# Altium PCB EMS_TC_PCB_V2.PcbDoc (part 2 of 2)
Units mil, origin at the board's own origin, x right, y up, seen from the top; angles counter-clockwise.
Board outline 4000 x 10000 mil, 4 copper layers (Top Layer, GND_1, Signal_2, GND_2), stack 53.912 mil thick; 64 components, 62 nets, 322 pads, 104 vias.
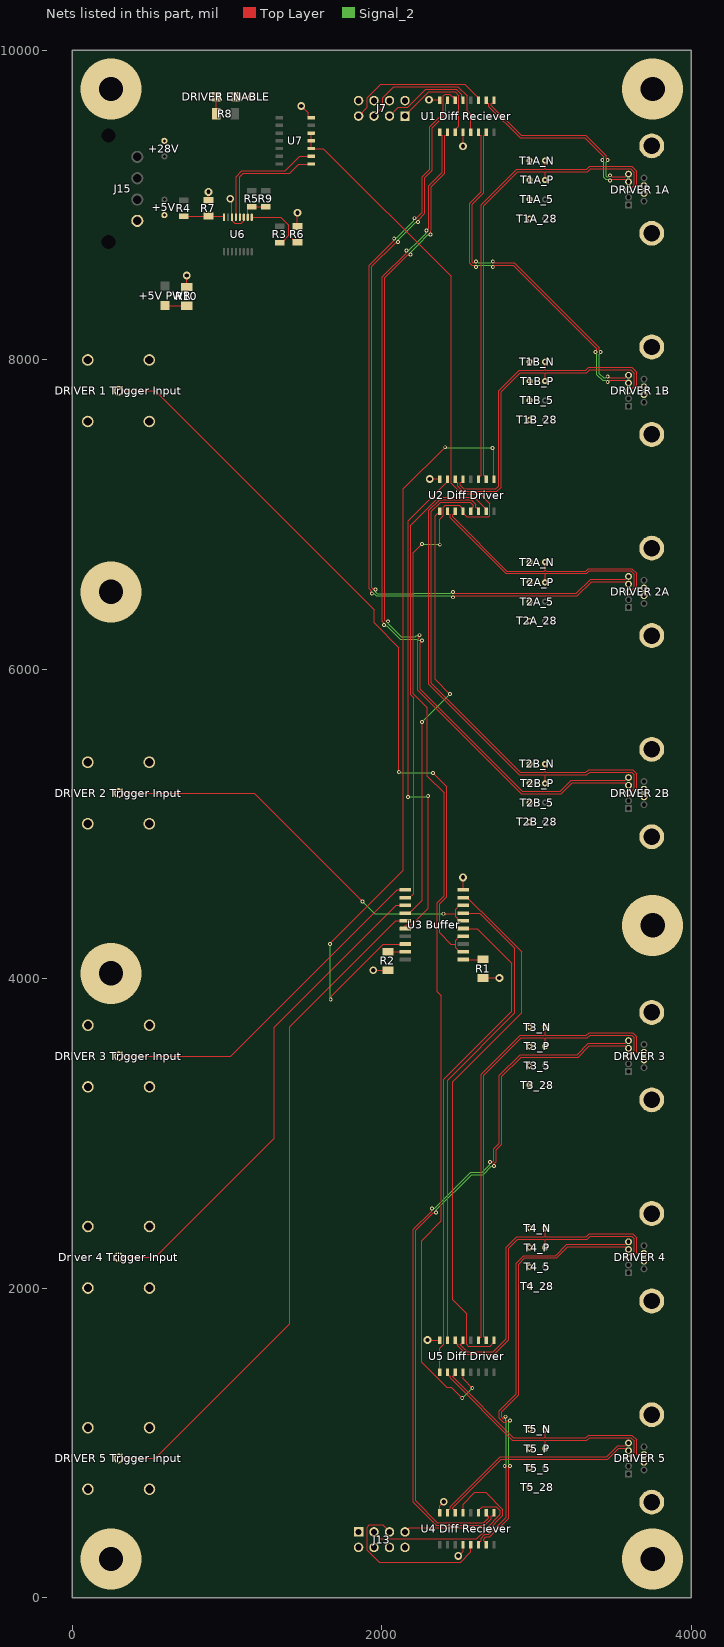
[diagram p4: the nets of this part, all layers, seen from the top]

## Via types
v1: diameter 25, hole 13, Top Layer to GND_2, 82 vias
v2: diameter 50, hole 28, Top Layer to GND_2, 15 vias
v3: diameter 393.7, hole 157.48, Top Layer to GND_2, 7 vias

## Nets (pads, with @x,y where several pads share a name; then routed paths per layer and width w, separated by ;. In a path a pad name is that pad's centre, name@x,y a point inside that pad or via, vN(x,y) a via of type N, cw(c..) or ccw(c..) an arc to the next point about the centre after c; other vN are vias at no path point) (continued)
GND: "DRIVER 1 Trigger Input.MH" "DRIVER 1A.7" "DRIVER 1A.10" "DRIVER 1A.11" "DRIVER 1B.7" "DRIVER 1B.10" "DRIVER 1B.11" "DRIVER 2 Trigger Input.MH" "DRIVER 2A.7" "DRIVER 2A.10" "DRIVER 2A.11" "DRIVER 2B.7" "DRIVER 2B.10" "DRIVER 2B.11" "DRIVER 3 Trigger Input.MH" "DRIVER 3.7" "DRIVER 3.10" "DRIVER 3.11" "Driver 4 Trigger Input.MH" "DRIVER 4.7" "DRIVER 4.10" "DRIVER 4.11" "DRIVER 5 Trigger Input.MH" "DRIVER 5.7" "DRIVER 5.10" "DRIVER 5.11" "DRIVER ENABLE.2" "U1 Diff Reciever.8" "U1 Diff Reciever.12" "U2 Diff Driver.8" "U3 Buffer.10" "U4 Diff Reciever.8" "U4 Diff Reciever.12" "U5 Diff Driver.8" +5V.2 +28V.2 J7.2 J7.4 J7.6 J7.8 J13.1 J13.2 J13.4 J13.6 J13.8 J15.A4 R1.2 R2.2 R6.1 R7.1 R10.1 T1A_5.2 T1A_28.2 T1A_N.2 T1A_P.2 T1B_5.2 T1B_28.2 T1B_N.2 T1B_P.2 T2A_5.2 T2A_28.2 T2A_N.2 T2A_P.2 T2B_5.2 T2B_28.2 T2B_N.2 T2B_P.2 T3_5.2 T3_28.2 T3_N.2 T3_P.2 T4_5.2 T4_28.2 T4_N.2 T4_P.2 T5_5.2 T5_28.2 T5_N.2 T5_P.2 U6.3 U6.6 U7.7 | length 1439.7
  Top Layer w6: R10.1@740,8470.08 v2(740,8545) ; R7.1@880,9031.18 v2(880,9085) ; v2(1020,9040) 1020,9028.09 1030.81,9017.29 1030.81,8922.03 U6.6@1031.61,8921.22 1031.61,8901.4 1037.31,8895.7 1037.31,8895.27 1048.97,8883.61 1091.03,8883.61 1106.9,8899.48 1106.9,8919.73 U6.3@1108.39,8921.22 ; 1057.99,9700 v2(1160,9700) ; R6.1@1455,8861.18 v2(1455,8950) ; v2(1480,9640) 1523.27,9596.73 1523.27,9572.83 1531.09,9565 U7.7@1543.35,9565 ; v2(1945,4055) R2.2@2040,4054.96 R2.2@2040,4054.96 ; v2(2295,1665) 2373.35,1665 2375,1663.35 ; v2(2305,9680) 2373.35,9680 2375,9678.35 ; v2(2310,7230) 2373.35,7230 2375,7228.35 ; 2375,550 2375,595 v2(2400,620) ; v2(2495,270) 2525,300 2525,343.31 ; v2(2525,4655) 2525,4576.24 2527.01,4574.23 ; v2(2525,9380) 2525,9471.65 ; R1.2@2655,4004.96 R1.2@2655,4004.96 v2(2760,4005)
  other v3: 250,250 3750,250 250,4035 3750,4345 250,6500 250,9750 3750,9750
INV_Driver_EN: "U2 Diff Driver.12" "U5 Diff Driver.12" U7.3 U7.4 U7.5 | length 9849.7
  Top Layer w6: U7.5@1543.35,9465 U7.4@1543.35,9415 U7.3@1543.35,9365 1622.63,9365 2448.83,8538.8 2448.83,7201.84 2517.67,7133 2637,7133 2698.83,7071.17 2698.83,6992.8 2690.07,6984.05 2548.83,6984.05 2525,7007.87 2525,7021.65 2525,7035.43 2501.17,7059.26 2409.93,7059.26 2398.83,7048.16 2398.83,6992.8 2375,6968.98 v1(2375,6805) ; v1(2260,6810) 2202.01,6752.01 2202.01,5842.99 2295,5750 2295,5310 2404.5,5200.5 2404.5,4536.69 2358,4490.19 2358,3917.1 2385,3890.1 2385,2435 2257,2307 2257,1521.98 2418.26,1360.72 2449.28,1360.72 v1(2520,1290) ; 2525,1456.65 2525,1415 v1(2585,1355)
  Signal_2 w6: v1(2260,6810) 2262.5,6807.5 2372.5,6807.5 v1(2375,6805) ; v1(2520,1290) v1(2585,1355)
NetDS1_1: "DRIVER ENABLE.1" R8.2 | length 110.9
  Top Layer w6: R8.2@929.92,9590 929.92,9697.91 932.01,9700
NetDS2_2: "+5V PWR.2" R10.2 | length 140
  Top Layer w6: 600,8350 739.92,8350 R10.2@740,8349.92
NetR1_1: "U3 Buffer.1" R1.1 | length 128.3
  Top Layer w6: 2527.01,4124.23 2654.19,4124.23 R1.1@2655,4125.04
NetR2_1: "U3 Buffer.19" R2.1 | length 113.3
  Top Layer w6: R2.1@2040,4175.04 2040.81,4174.23 2152.99,4174.23
NetR3_1: R3.1 R6.2 U6.1 | length 480
  Top Layer w6: U6.1@1159.57,8921.22 1347.56,8921.22 1399.37,8869.41 1399.37,8804.41 1352.8,8757.83 R3.1@1340,8757.83 ; 1398.48,8803.52 1443.19,8758.82 R6.2@1455,8758.82
NetR4_1: R4.1 R7.2 U6.8 | length 266.3
  Top Layer w6: R4.1@720,8927.83 879.02,8927.83 R7.2@880,8928.82 976.84,8928.82 980.43,8925.23 U6.8@980.43,8921.22
NetR5_1: R5.1 R9.2 U6.2 | length 174
  Top Layer w6: U6.2@1133.98,8921.22 1133.98,8973.12 1148.69,8987.83 R5.1@1160,8987.83 R9.2@1250,8987.83
T1A: "U2 Diff Driver.1" "U3 Buffer.18" | length 5036.1
  Top Layer w6: v1(1665,4225) 2140,4700 2140,7165 v1(2410,7435) ; v1(1670,3865) 1673.04,3868.04 1673.04,3886.5 2010.77,4224.23 2152.99,4224.23 ; v1(2715,7430) 2725,7420 2725,7228.35
  Signal_2 w6: v1(1665,4225) 1667.5,4222.5 1667.5,3867.5 v1(1670,3865) ; v1(2410,7435) 2412.5,7432.5 2712.5,7432.5 v1(2715,7430)
T1B: "U2 Diff Driver.7" "U3 Buffer.16" | length 3229.5
  Top Layer w6: 2152.99,4324.23 2152.99,4345.04 2157.37,4349.42 2194.6,4349.42 2300,4454.82 v1(2300,5180) ; v1(2170,5175) 2170.01,6959.58 2425,7214.57 2425,7228.35
  Signal_2 w6: v1(2170,5175) 2172.5,5177.5 2297.5,5177.5 v1(2300,5180)
T2A: "U2 Diff Driver.9" "U3 Buffer.14" | length 2783.1
  Top Layer w6: 2152.99,4424.23 2178.58,4424.23 2260,4505.65 v1(2260,5660) ; 2375,7021.65 2345,6991.65 2345,5935 v1(2440,5840)
  Signal_2 w6: v1(2260,5660) v1(2440,5840)
T2B: "U2 Diff Driver.15" "U3 Buffer.12" | length 3060.8
  Top Layer w6: 2152.99,4524.23 2178.58,4524.23 2205,4550.65 2205,5815 2186.01,5833.99 2186.01,6931.27 2366.75,7112 2598.43,7112 2675,7035.43 2675,7021.65
T3: "U3 Buffer.9" "U5 Diff Driver.1" | length 3486.3
  Top Layer w6: 2527.01,4524.23 2552.6,4524.23 2636.6,4440.23 2639.77,4440.23 2905,4175 2905,3780 2460,3335 2460,1925 2548.83,1836.17 2548.83,1636.84 2559.93,1625.74 2701.17,1625.74 2725,1649.57 2725,1663.35
T4: "U3 Buffer.7" "U5 Diff Driver.7" | length 3141.2
  Top Layer w6: 2425,1663.35 2425,3345 2860,3780 2860,4197.37 2633.14,4424.23 2527.01,4424.23
T5: "U3 Buffer.5" "U5 Diff Driver.9" | length 3241.8
  Top Layer w6: 2375,1456.65 2375,1610.67 2401.17,1636.84 2401.17,3351.17 2840,3790 2840,4100 2615.77,4324.23 2527.01,4324.23
TELE_1_A_N: "DRIVER 1A.5" "U1 Diff Reciever.1" | length 1222.4
  Top Layer w6: 2725,9678.35 2725,9665.25 2717.17,9657.43 2711.51,9657.43 2708,9653.91 2708,9642.67 2900.67,9450 3318.03,9450 3437.61,9330.42 3450.5,9317.53 3450.5,9303.01 3460,9293.51 v1(3460,9290) ; v1(3475,9192.5) 3478.51,9192.5 3488.01,9183 3572.55,9183 3589.55,9200 3594.49,9200
  Signal_2 w6: v1(3460,9290) 3460,9286.49 3450.5,9276.99 3450.5,9186.59 3454.09,9183 3461.99,9183 3471.49,9192.5 v1(3475,9192.5)
TELE_1_A_P: "DRIVER 1A.4" "U1 Diff Reciever.2" | length 1248.9
  Top Layer w6: 2675,9678.35 2675,9665.25 2682.83,9657.43 2688.49,9657.43 2692,9653.91 2692,9636.04 2894.04,9434 3311.41,9434 3430.99,9314.42 3434.5,9310.91 3434.5,9303.01 3425,9293.51 v1(3425,9290) ; v1(3475,9157.5) 3478.51,9157.5 3488.01,9167 3572.55,9167 3589.55,9150 3594.49,9150
  Signal_2 w6: v1(3425,9290) 3425,9286.49 3434.5,9276.99 3434.5,9179.97 3447.47,9167 3461.99,9167 3471.49,9157.5 v1(3475,9157.5)
TELE_1_B_N: "DRIVER 1B.5" "U1 Diff Reciever.15" | length 2336.7
  Top Layer w6: v1(2610,8635.5) 2606.49,8635.5 2596.99,8626 2589.09,8626 2585.58,8629.51 2585.58,9006.37 2658,9078.79 2658,9447.22 2661.51,9450.74 2667.17,9450.74 2675,9458.56 2675,9471.65 ; v1(2717.5,8635) 2718.51,8635 2728.01,8625.5 2857.53,8625.5 3405.5,8077.53 3405.5,8063.01 3415,8053.51 v1(3415,8050) ; v1(3460,7892.5) 3463.51,7892.5 3473.01,7883 3572.55,7883 3589.55,7900 3594.49,7900
  Signal_2 w6: v1(2610,8635.5) 2613.51,8635.5 2623.01,8626 2660.88,8626 2661.38,8625.5 2702.86,8625.5 2712.36,8635 v1(2717.5,8635) ; v1(3415,8050) 3415,8046.49 3405.5,8036.99 3405.5,7910.94 3433.44,7883 3446.99,7883 3456.49,7892.5 v1(3460,7892.5)
TELE_1_B_P: "DRIVER 1B.4" "U1 Diff Reciever.14" | length 2363.2
  Top Layer w6: v1(2610,8600.5) 2606.49,8600.5 2596.99,8610 2582.47,8610 2569.58,8622.89 2569.58,9013 2642,9085.42 2642,9447.22 2638.49,9450.74 2632.83,9450.74 2625,9458.56 2625,9471.65 ; v1(2717.5,8600) 2718.51,8600 2728.01,8609.5 2850.91,8609.5 3389.5,8070.91 3389.5,8063.01 3380,8053.51 v1(3380,8050) ; v1(3460,7857.5) 3463.51,7857.5 3473.01,7867 3572.55,7867 3589.55,7850 3594.49,7850
  Signal_2 w6: v1(2610,8600.5) 2613.51,8600.5 2623.01,8610 2654.25,8610 2654.75,8609.5 2702.86,8609.5 2712.36,8600 v1(2717.5,8600) ; v1(3380,8050) 3380,8046.49 3389.5,8036.99 3389.5,7904.31 3426.81,7867 3446.99,7867 3456.49,7857.5 v1(3460,7857.5)
TELE_1A: "U1 Diff Reciever.3" J7.7 | length 946.1
  Top Layer w6: J7.7@1850,9575 1906.49,9631.49 1906.49,9693.02 1993.42,9779.95 2537.17,9779.95 2625,9692.13 2625,9678.35
TELE_1B: "U1 Diff Reciever.13" J7.5 | length 983
  Top Layer w6: J7.5@1950,9575 2006.49,9631.49 2006.49,9693.02 2077.42,9763.95 2492.07,9763.95 2551.17,9704.85 2551.17,9610.97 2575,9587.14 2575,9471.65
TELE_2_A_N: "DRIVER 2A.5" "U1 Diff Reciever.7" | length 5107.3
  Top Layer w6: v1(1960,6515) 1957.51,6517.49 1944.08,6517.49 1934.5,6527.07 1934.5,8602.93 2089.08,8757.51 2102.51,8757.51 v1(2105,8760) ; v1(2235,8890) 2237.49,8892.49 2237.49,8905.92 2277.56,8946 2277.56,9174.93 2326,9223.37 2326,9498.37 2414.83,9587.2 2414.83,9654.39 2425,9664.57 2425,9678.35 ; v1(2460,6500) 2463.51,6500 2473.01,6490.5 3257.87,6490.5 3350.37,6583 3572.55,6583 3589.55,6600 3594.49,6600
  Signal_2 w6: v1(1960,6515) 1962.49,6512.51 1962.49,6499.08 1972.07,6489.5 2208.31,6489.5 2209.31,6490.5 2446.99,6490.5 2456.49,6500 v1(2460,6500) ; v1(2105,8760) 2107.49,8762.49 2107.49,8775.92 2164.25,8832.69 2219.08,8887.51 2232.51,8887.51 v1(2235,8890)
TELE_2_A_P: "DRIVER 2A.4" "U1 Diff Reciever.6" | length 5260.1
  Top Layer w6: v1(1935.25,6490.25) 1932.77,6492.74 1932.77,6506.17 1918.5,6520.44 1918.5,8609.56 2077.77,8768.83 2077.77,8782.26 v1(2080.25,8784.75) ; v1(2210.25,8914.75) 2212.74,8917.23 2226.17,8917.23 2261.56,8952.62 2261.56,9181.56 2310,9230 2310,9505 2398.83,9593.83 2398.83,9704.85 2409.93,9715.95 2440.07,9715.95 2456.76,9699.26 2467.17,9699.26 2475,9691.44 2475,9678.35 ; v1(2460,6465) 2463.51,6465 2473.01,6474.5 3264.5,6474.5 3357,6567 3572.55,6567 3589.55,6550 3594.49,6550
  Signal_2 w6: v1(1935.25,6490.25) 1937.74,6487.77 1951.17,6487.77 1965.44,6473.5 2214.94,6473.5 2215.94,6474.5 2446.99,6474.5 2456.49,6465 v1(2460,6465) ; v1(2080.25,8784.75) 2082.74,8787.23 2096.17,8787.23 2157.63,8848.69 2207.77,8898.83 2207.77,8912.26 v1(2210.25,8914.75)
TELE_2_B_N: "DRIVER 2B.5" "U1 Diff Reciever.9" | length 5630.6
  Top Layer w6: v1(2015.25,6285.25) 2012.77,6287.74 2012.77,6301.17 2002.5,6311.44 2002.5,6341.91 2004,6343.41 2004,8535.94 2157.33,8689.27 2157.33,8702.7 v1(2159.81,8705.19) ; v1(2259.51,6185) 2259.51,6181.49 2250.01,6171.99 2250.01,5870.24 2909.25,5211 3151.83,5211 3223.83,5283 3572.55,5283 3589.55,5300 3594.49,5300 ; v1(2289.25,8835) 2290,8835 2305,8850 2305,9125.33 2392,9212.33 2392,9447.22 2388.49,9450.74 2382.83,9450.74 2375,9458.56 2375,9471.65
  Signal_2 w6: v1(2015.25,6285.25) 2017.74,6282.77 2031.17,6282.77 2119.44,6194.5 2230.93,6194.5 2238.01,6187.41 2257.1,6187.41 v1(2259.51,6185) ; v1(2159.81,8705.19) 2162.3,8707.67 2175.73,8707.67 2234.2,8766.14 2286.95,8818.89 2286.95,8832.7 v1(2289.25,8835)
TELE_2_B_P: "DRIVER 2B.4" "U1 Diff Reciever.10" | length 5657.2
  Top Layer w6: v1(2040,6310) 2037.51,6312.49 2024.08,6312.49 2018.5,6318.07 2018.5,6335.28 2020,6336.78 2020,8529.31 2168.64,8677.95 2182.08,8677.95 v1(2184.56,8680.44) ; v1(2243.51,6220) 2241.25,6217.74 2241.25,6202.8 2234.01,6195.56 2234.01,5863.61 2902.63,5195 3158.46,5195 3230.46,5267 3572.55,5267 3589.55,5250 3594.49,5250 ; v1(2314.75,8810.25) 2316.93,8812.43 2316.93,8831.75 2321,8835.82 2321,9118.7 2408,9205.7 2408,9447.22 2411.51,9450.74 2417.17,9450.74 2425,9458.56 2425,9471.65
  Signal_2 w6: v1(2040,6310) 2042.49,6307.51 2042.49,6294.08 2126.07,6210.5 2216.99,6210.5 2222.85,6216.36 2239.88,6216.36 v1(2243.51,6220) ; v1(2184.56,8680.44) 2187.05,8682.92 2187.05,8696.36 2240.83,8750.14 2298.64,8807.95 2312.45,8807.95 v1(2314.75,8810.25)
TELE_2A: "U1 Diff Reciever.5" J7.3 | length 590.3
  Top Layer w6: J7.3@2050,9575 2106.49,9631.49 2168.02,9631.49 2284.49,9747.95 2480.7,9747.95 2517.17,9711.48 2517.17,9686.17 2525,9678.35
TELE_2B: "U1 Diff Reciever.11" J7.1 | length 671.7
  Top Layer w6: J7.1@2150,9575 2177.51,9602.51 2177.51,9606.25 2303.21,9731.95 2474.07,9731.95 2498.83,9707.2 2498.83,9509.26 2475,9485.43 2475,9471.65
TELE_3: "U4 Diff Reciever.3" J13.7 | length 862.4
  Top Layer w6: J13.7@2150,425 2178,453 2680.68,453 2766.92,539.24 2766.92,560.76 2740.07,587.61 2648.83,587.61 2625,563.78 2625,550
TELE_3_N: "DRIVER 3.5" "U4 Diff Reciever.1" | length 4607.9
  Top Layer w6: v1(2325.25,2514.75) 2322.77,2512.26 2322.77,2498.83 2204,2380.06 2204,618.37 2353.37,469 2666.63,469 2708,510.37 2708,525.57 2711.51,529.08 2717.17,529.08 2725,536.91 2725,550 ; v1(2700,2815) 2702.49,2817.49 2715.92,2817.49 2722.67,2824.24 2722.67,2900.3 2759,2936.63 2759,3375.63 2893.37,3510 3262.37,3510 3335.37,3583 3572.55,3583 3589.55,3600 3594.49,3600
  Signal_2 w6: v1(2325.25,2514.75) 2327.74,2517.23 2341.17,2517.23 2574.31,2750.38 2648.81,2750.38 2697.51,2799.08 2697.51,2812.51 v1(2700,2815)
TELE_3_P: "DRIVER 3.4" "U4 Diff Reciever.2" | length 4528.4
  Top Layer w6: v1(2350,2490) 2347.51,2487.51 2334.08,2487.51 2220,2373.43 2220,625 2360,485 2660,485 2692,517 2692,525.57 2688.49,529.08 2682.83,529.08 2675,536.91 2675,550 ; v1(2724.75,2790.25) 2727.23,2792.74 2727.23,2806.17 2738.67,2817.61 2738.67,2893.67 2775,2930 2775,3369 2900,3494 3269,3494 3342,3567 3572.55,3567 3589.55,3550 3594.49,3550
  Signal_2 w6: v1(2350,2490) 2352.49,2492.49 2352.49,2505.92 2580.94,2734.38 2655.44,2734.38 2708.83,2787.77 2722.26,2787.77 v1(2724.75,2790.25)
TELE_4: "U4 Diff Reciever.13" J13.5 | length 1092.1
  Top Layer w6: J13.5@2050,425 2005,470 1920,470 1906.49,456.49 1906.49,306.98 1983.47,230 2508.74,230 2575,296.26 2575,343.31
TELE_4_N: "DRIVER 4.5" "U4 Diff Reciever.15" | length 2827.8
  Top Layer w6: 2675,343.31 2675,356.4 2667.17,364.23 2661.51,364.23 2658,367.74 2658,378.98 2672.02,393 2698.25,393 2820,514.75 2820,845 2825,850 v1(2829.5,850) ; v1(2828.81,1145.91) 2827.05,1144.15 2812.16,1144.15 2801.72,1133.7 2783.67,1133.7 2759,1158.37 2759,1208.97 2869,1318.97 2869,2161.94 2918.37,2211.31 3123.69,2211.31 3195.37,2283 3572.55,2283 3589.55,2300 3594.49,2300
  Signal_2 w6: v1(2828.81,1145.91) 2826.6,1145.91 2820,1139.31 2820,863.01 2829.5,853.51 v1(2829.5,850)
TELE_4_P: "DRIVER 4.4" "U4 Diff Reciever.14" | length 2763.2
  Top Layer w6: 2625,343.31 2625,356.4 2632.83,364.23 2638.49,364.23 2642,367.74 2642,385.61 2665.39,409 2691.63,409 2804,521.37 2804,845 2799,850 v1(2794.5,850) ; v1(2800.25,1169.75) 2799.25,1169.75 2787.24,1157.73 2782.27,1157.73 2775,1165 2775,1202.34 2885,1312.34 2885,2155.31 2925,2195.31 3130.31,2195.31 3202,2267 3572.55,2267 3589.55,2250 3594.49,2250
  Signal_2 w6: v1(2794.5,850) 2794.5,853.51 2804,863.01 2804,1139.31 2800.25,1143.06 v1(2800.25,1169.75)
TELE_5: "U4 Diff Reciever.5" J13.3 | length 1338.9
  Top Layer w6: J13.3@1950,425 1993.51,381.49 2615.25,381.49 2670.76,437 2687.3,437 2782.92,532.62 2782.92,567.38 2670.3,680 2600,680 2525,605 2525,550
TELE_5_N: "DRIVER 5.5" "U4 Diff Reciever.7" | length 1370.7
  Top Layer w6: 2425,550 2425,563.09 2432.83,570.92 2438.49,570.92 2442,574.43 2442,586.65 2765.35,910 3452.37,910 3525.37,983 3572.55,983 3589.55,1000 3594.49,1000
TELE_5_P: "DRIVER 5.4" "U4 Diff Reciever.6" | length 1344.2
  Top Layer w6: 2475,550 2475,563.09 2467.17,570.92 2461.51,570.92 2458,574.43 2458,580.02 2771.98,894 3459,894 3532,967 3572.55,967 3589.55,950 3594.49,950
TRIG_1_A_N: "DRIVER 1A.8" "U2 Diff Driver.3" T1A_N.1 | length 3098.5
  Top Layer w6: 2625,7228.35 2625,7241.44 2632.83,7249.26 2638.49,7249.26 2642,7252.78 2642,9001.13 2873.37,9232.5 3051.49,9232.5 3055,9236.01 ; T1A_N.1@3055,9287 3055,9236.01 ; 3694.49,9125 3650.83,9125 3647.31,9128.51 3647.31,9219.37 3615.63,9251.05 3342.65,9251.05 3324.1,9232.5 3058.51,9232.5 3055,9236.01
TRIG_1_A_P: "DRIVER 1A.3" "U2 Diff Driver.2" T1A_P.1 | length 3045.6
  Top Layer w6: 2675,7228.35 2675,7241.44 2667.17,7249.26 2661.51,7249.26 2658,7252.78 2658,8994.5 2880,9216.5 3051.49,9216.5 3055,9212.99 ; T1A_P.1@3055,9162 3055,9212.99 ; 3594.49,9100 3602.97,9100 3631.31,9128.34 3631.31,9212.74 3609.01,9235.05 3349.28,9235.05 3330.73,9216.5 3058.51,9216.5 3055,9212.99
TRIG_1_B_N: "DRIVER 1B.8" "U2 Diff Driver.5" T1B_N.1 | length 2092.5
  Top Layer w6: 2525,7228.35 2525,7215.25 2517.17,7207.43 2511.51,7207.43 2508,7203.91 2508,7187.93 2530.93,7165 2736.78,7165 2754.57,7182.8 2754.57,7798.7 2888.37,7932.5 3051.49,7932.5 3055,7936.01 ; T1B_N.1@3055,7987 3055,7936.01 ; 3694.49,7825 3650.83,7825 3647.31,7828.51 3647.31,7919.37 3615.63,7951.05 3336.59,7951.05 3318.04,7932.5 3058.51,7932.5 3055,7936.01
TRIG_1_B_P: "DRIVER 1B.3" "U2 Diff Driver.6" T1B_P.1 | length 2092.6
  Top Layer w6: 2475,7228.35 2475,7215.25 2482.83,7207.43 2488.49,7207.43 2492,7203.91 2492,7181.3 2524.3,7149 2743.4,7149 2770.57,7176.17 2770.57,7792.07 2895,7916.5 3051.49,7916.5 3055,7912.99 ; T1B_P.1@3055,7862 3055,7912.99 ; 3594.49,7800 3602.97,7800 3631.31,7828.34 3631.31,7912.74 3609.01,7935.05 3343.22,7935.05 3324.67,7916.5 3058.51,7916.5 3055,7912.99
TRIG_1_IN: "DRIVER 1 Trigger Input.1" "U3 Buffer.2" "U3 Buffer.4" | length 4971.3
  Top Layer w6: 298.82,7800 535,7800 1950,6385 1950,6300 2110,6140 v1(2110,5335) ; v1(2331.5,5330) 2331.5,5328.5 2420.5,5239.5 2420.5,4530.06 2374,4483.56 2374,4296 2445.77,4224.23 2476.61,4224.23 ; 2527.01,4174.23 2501.42,4174.23 2476.61,4199.04 2476.61,4224.23 ; 2527.01,4274.23 2501.42,4274.23 2476.61,4249.42 2476.61,4224.23
  Signal_2 w6: v1(2110,5335) 2112.5,5332.5 2329,5332.5 v1(2331.5,5330)
TRIG_2_A_N: "DRIVER 2A.8" "U2 Diff Driver.11" T2A_N.1 | length 1596.4
  Top Layer w6: 2475,7021.65 2475,7008.56 2467.17,7000.74 2461.51,7000.74 2458,6997.22 2458,6985.94 2808.94,6635 3051.49,6635 3055,6638.51 ; T2A_N.1@3055,6692 3055,6638.51 ; 3694.49,6525 3650.83,6525 3647.31,6528.51 3647.31,6619.37 3615.63,6651.05 3335.34,6651.05 3319.29,6635 3058.51,6635 3055,6638.51
TRIG_2_A_P: "DRIVER 2A.3" "U2 Diff Driver.10" T2A_P.1 | length 1596.5
  Top Layer w6: 2425,7021.65 2425,7008.56 2432.83,7000.74 2438.49,7000.74 2442,6997.22 2442,6979.31 2802.31,6619 3051.49,6619 3055,6615.49 ; T2A_P.1@3055,6562 3055,6615.49 ; 3594.49,6500 3602.97,6500 3631.31,6528.34 3631.31,6612.74 3609.01,6635.05 3341.97,6635.05 3325.92,6619 3058.51,6619 3055,6615.49
TRIG_2_B_N: "DRIVER 2B.8" "U2 Diff Driver.13" T2B_N.1 | length 3247.8
  Top Layer w6: 2575,7021.65 2575,7034.75 2582.83,7042.57 2588.49,7042.57 2592,7046.09 2592,7059.49 2571.49,7080 2380,7080 2320,7020 2320,5908.5 2895,5333.5 3051.49,5333.5 3055,5337.01 ; T2B_N.1@3055,5388 3055,5337.01 ; 3694.49,5225 3650.83,5225 3647.31,5228.51 3647.31,5325.32 3621.58,5351.05 3336.09,5351.05 3318.54,5333.5 3058.51,5333.5 3055,5337.01
TRIG_2_B_P: "DRIVER 2B.3" "U2 Diff Driver.14" T2B_P.1 | length 3300.9
  Top Layer w6: 2625,7021.65 2625,7034.75 2617.17,7042.57 2611.51,7042.57 2608,7046.09 2608,7066.11 2578.11,7096 2373.37,7096 2304,7026.63 2304,5901.87 2888.37,5317.5 3051.49,5317.5 3055,5313.99 ; T2B_P.1@3055,5263 3055,5313.99 ; 3594.49,5200 3602.97,5200 3631.31,5228.34 3631.31,5318.69 3614.95,5335.05 3342.72,5335.05 3325.17,5317.5 3058.51,5317.5 3055,5313.99
TRIG_2_IN: "DRIVER 2 Trigger Input.1" "U3 Buffer.6" "U3 Buffer.8" | length 2674.4
  Top Layer w6: 298.82,5200 1175,5200 v1(1875,4500) ; v1(2399.5,4420) 2472.37,4420 2476.61,4424.23 ; 2527.01,4374.23 2501.42,4374.23 2476.61,4399.04 2476.61,4424.23 ; 2527.01,4474.23 2501.42,4474.23 2476.61,4449.42 2476.61,4424.23
  Signal_2 w6: v1(1875,4500) 1955,4420 v1(2399.5,4420)
TRIG_3_IN: "DRIVER 3 Trigger Input.1" "U3 Buffer.11" | length 2298
  Top Layer w6: 300,3500 1025,3500 2099.23,4574.23 2152.99,4574.23
TRIG_3_N: "DRIVER 3.8" "U5 Diff Driver.3" T3_N.1 | length 3056.3
  Top Layer w6: 2625,1663.35 2625,1676.44 2632.83,1684.26 2638.49,1684.26 2642,1687.78 2642,3382.13 2893.37,3633.5 3051.49,3633.5 3055,3637.01 ; T3_N.1@3055,3688 3055,3637.01 ; 3694.49,3525 3650.83,3525 3647.31,3528.51 3647.31,3626.19 3622.45,3651.05 3339.5,3651.05 3321.95,3633.5 3058.51,3633.5 3055,3637.01
TRIG_3_P: "DRIVER 3.3" "U5 Diff Driver.2" T3_P.1 | length 3003.4
  Top Layer w6: 2675,1663.35 2675,1676.44 2667.17,1684.26 2661.51,1684.26 2658,1687.78 2658,3375.5 2900,3617.5 3051.49,3617.5 3055,3613.99 ; T3_P.1@3055,3563 3055,3613.99 ; 3594.49,3500 3602.97,3500 3631.31,3528.34 3631.31,3619.56 3615.83,3635.05 3346.13,3635.05 3328.58,3617.5 3058.51,3617.5 3055,3613.99
TRIG_4_IN: "Driver 4 Trigger Input.1" "U3 Buffer.13" | length 3213.8
  Top Layer w6: 300,2200 535,2200 1305,2970 1305,3685 2094.23,4474.23 2152.99,4474.23
TRIG_4_N: "DRIVER 4.8" "U5 Diff Driver.5" T4_N.1 | length 2069.1
  Top Layer w6: 2525,1663.35 2525,1650.26 2517.17,1642.43 2511.51,1642.43 2508,1638.91 2508,1633.33 2551.33,1590 2720,1590 2804,1674 2804,2264.13 2873.37,2333.5 3051.49,2333.5 3055,2337.01 ; T4_N.1@3055,2388 3055,2337.01 ; 3694.49,2225 3650.83,2225 3647.31,2228.51 3647.31,2326.19 3622.45,2351.05 3339.5,2351.05 3321.95,2333.5 3058.51,2333.5 3055,2337.01
TRIG_4_P: "DRIVER 4.3" "U5 Diff Driver.6" T4_P.1 | length 2069.2
  Top Layer w6: 2475,1663.35 2475,1650.26 2482.83,1642.43 2488.49,1642.43 2492,1638.91 2492,1626.7 2544.7,1574 2726.63,1574 2820,1667.37 2820,2257.5 2880,2317.5 3051.49,2317.5 3055,2313.99 ; T4_P.1@3055,2263 3055,2313.99 ; 3594.49,2200 3602.97,2200 3631.31,2228.34 3631.31,2319.56 3615.83,2335.05 3346.13,2335.05 3328.58,2317.5 3058.51,2317.5 3055,2313.99
TRIG_5_IN: "DRIVER 5 Trigger Input.1" "U3 Buffer.15" | length 4416.8
  Top Layer w6: 300,900 535,900 1405,1770 1405,3690 2089.23,4374.23 2152.99,4374.23
TRIG_5_N: "DRIVER 5.8" "U5 Diff Driver.11" T5_N.1 | length 1606.3
  Top Layer w6: 2475,1456.65 2475,1443.56 2467.17,1435.74 2461.51,1435.74 2458,1432.22 2458,1426.63 2851.13,1033.5 3051.49,1033.5 3055,1037.01 ; T5_N.1@3055,1088 3055,1037.01 ; 3694.49,925 3650.83,925 3647.31,928.51 3647.31,1019.37 3615.63,1051.05 3336.09,1051.05 3318.54,1033.5 3058.51,1033.5 3055,1037.01
TRIG_5_P: "DRIVER 5.3" "U5 Diff Driver.10" T5_P.1 | length 1606.4
  Top Layer w6: 2425,1456.65 2425,1443.56 2432.83,1435.74 2438.49,1435.74 2442,1432.22 2442,1420.01 2844.51,1017.5 3051.49,1017.5 3055,1013.99 ; T5_P.1@3055,963 3055,1013.99 ; 3594.49,900 3602.97,900 3631.31,928.34 3631.31,1012.74 3609.01,1035.05 3342.72,1035.05 3325.17,1017.5 3058.51,1017.5 3055,1013.99
VOUT_5V: U6.5 U7.2 | length 802.1
  Top Layer w6: U6.5@1057.2,8921.22 1058.69,8922.71 1058.69,9183.69 1096,9221 1376,9221 1470,9315 U7.2@1543.35,9315
VOUT_28V: U6.4 U7.1 | length 756.2
  Top Layer w6: U6.4@1082.8,8921.22 1082.8,9182.8 1105,9205 1404.57,9205 1464.57,9265 U7.1@1543.35,9265
pads on no net: "DRIVER 1A.9" "DRIVER 1B.9" "DRIVER 2A.9" "DRIVER 2B.9" "DRIVER 3.9" "DRIVER 4.9" "DRIVER 5.9" "U3 Buffer.3" "U3 Buffer.17" "U4 Diff Reciever.9" "U4 Diff Reciever.10" "U4 Diff Reciever.11" "U5 Diff Driver.13" "U5 Diff Driver.14" "U5 Diff Driver.15" J15.0 U6.9 U6.10 U6.12 U6.13 U6.15 U6.16 U7.8 U7.9 U7.10 U7.11 U7.12 U7.13

## Polygon pours and split planes (outlines as drawn)
GND on GND_2 "GND_L04_P000" (solid, pour order 0): 0,10000 4000,10000 4000,0 0,0 0,100
GND on GND_1 "GND_L02_P001" (solid, pour order 1): 0,10000 4000,10000 4000,0 0,0
GND on Signal_2 "GND_L03_P002" (solid, pour order 2): 0,10000 4000,10000 4000,0 0,0

## Keep-outs
Keep-Out Layer:
  the board outline again, w20

## Silkscreen, mask and mechanical layers (free items; w line width, h text height)
Top Overlay:
  lines w40: 50,4350 1380,4350 1820,4790 2720,4790 3160,4350 3505,4350
  text "GND" at 1600,9650 h60
  text "Telemetry 1A" at 1819.99,9490 h60 r270
  text "Telemetry 1B" at 1919.99,9490 h60 r270
  text "Telemetry 2A" at 2019.99,9490 h60 r270
  text "Telemetry 2B" at 2119.99,9490 h60 r270
  text "Dual Driver Test Side" at 1150,7679.35 h200 r270
  text "Drives 1A & 1B" at 210,7470 h60 r270
  text "EMS Driver / Test Board / 11/2/2021 / Sam Raizman" at 50,6220 h60 r270
  text "Drives 2A & 2B" at 210,4870 h60 r270
  text "Single Driver Test Side" at 1150,3464.68 h200 r270
  text "Telemetry 5" at 1919.99,1140 h60 r270
  text "Telemetry 4" at 2019.99,1140 h60 r270
  text "Telemetry 3" at 2119.99,1140 h60 r270
  text "GND" at 1820,680 h60 r270
  text "GND" at 1600,290 h60
Bottom Overlay:
  text "Test Proceedure: / 1. Connect +28V and +5V / (5V current should be around 0.5A) / (28V current should be 0A) / 2. Probe +28V and +5V Driver Test Points / 3. Connect Trigger Input Signal / 4. Probe P and N Trigger Driver Test Points / (These should be Positive and Negative Differentials of the Trigger Input) / (If there are any problems, probe U2 and U3 for the origin signals) / 5. Probe the Driver Telemetry Signals from J7 and J13 / (While disconnected the Telemetry has a roughly 4V pull up resistor.) / 6. With signals verified, power off the Power and Trigger / 7. Plug in the Drivers needed and power back on. / 8. Verify Current once more. / (28V current should be 15mA per Driver connected at 2kHz) / (For other frequencies use I = (W * N)/V ) / W = Power = 100 [uJ] / N = Frequency [Hz] * 2" at 2590,8470 h60 r90

## Text inside footprints (layer, text, board x,y; h text height)
J15: Top Overlay "A1" at 475,9485 h59.06 r270